# Altium PCB BioZ.PcbDoc (part 2 of 3)
Units mm, origin at the board's own origin, x right, y up, seen from the top; angles counter-clockwise.
Board outline 88 x 75 mm, 4 copper layers (Top Layer, GND1, GND 2, Bottom Layer), stack 1.564 mm thick; 174 components, 106 nets, 519 pads, 307 vias.
Unrouted connection lines stored in the file: 5.
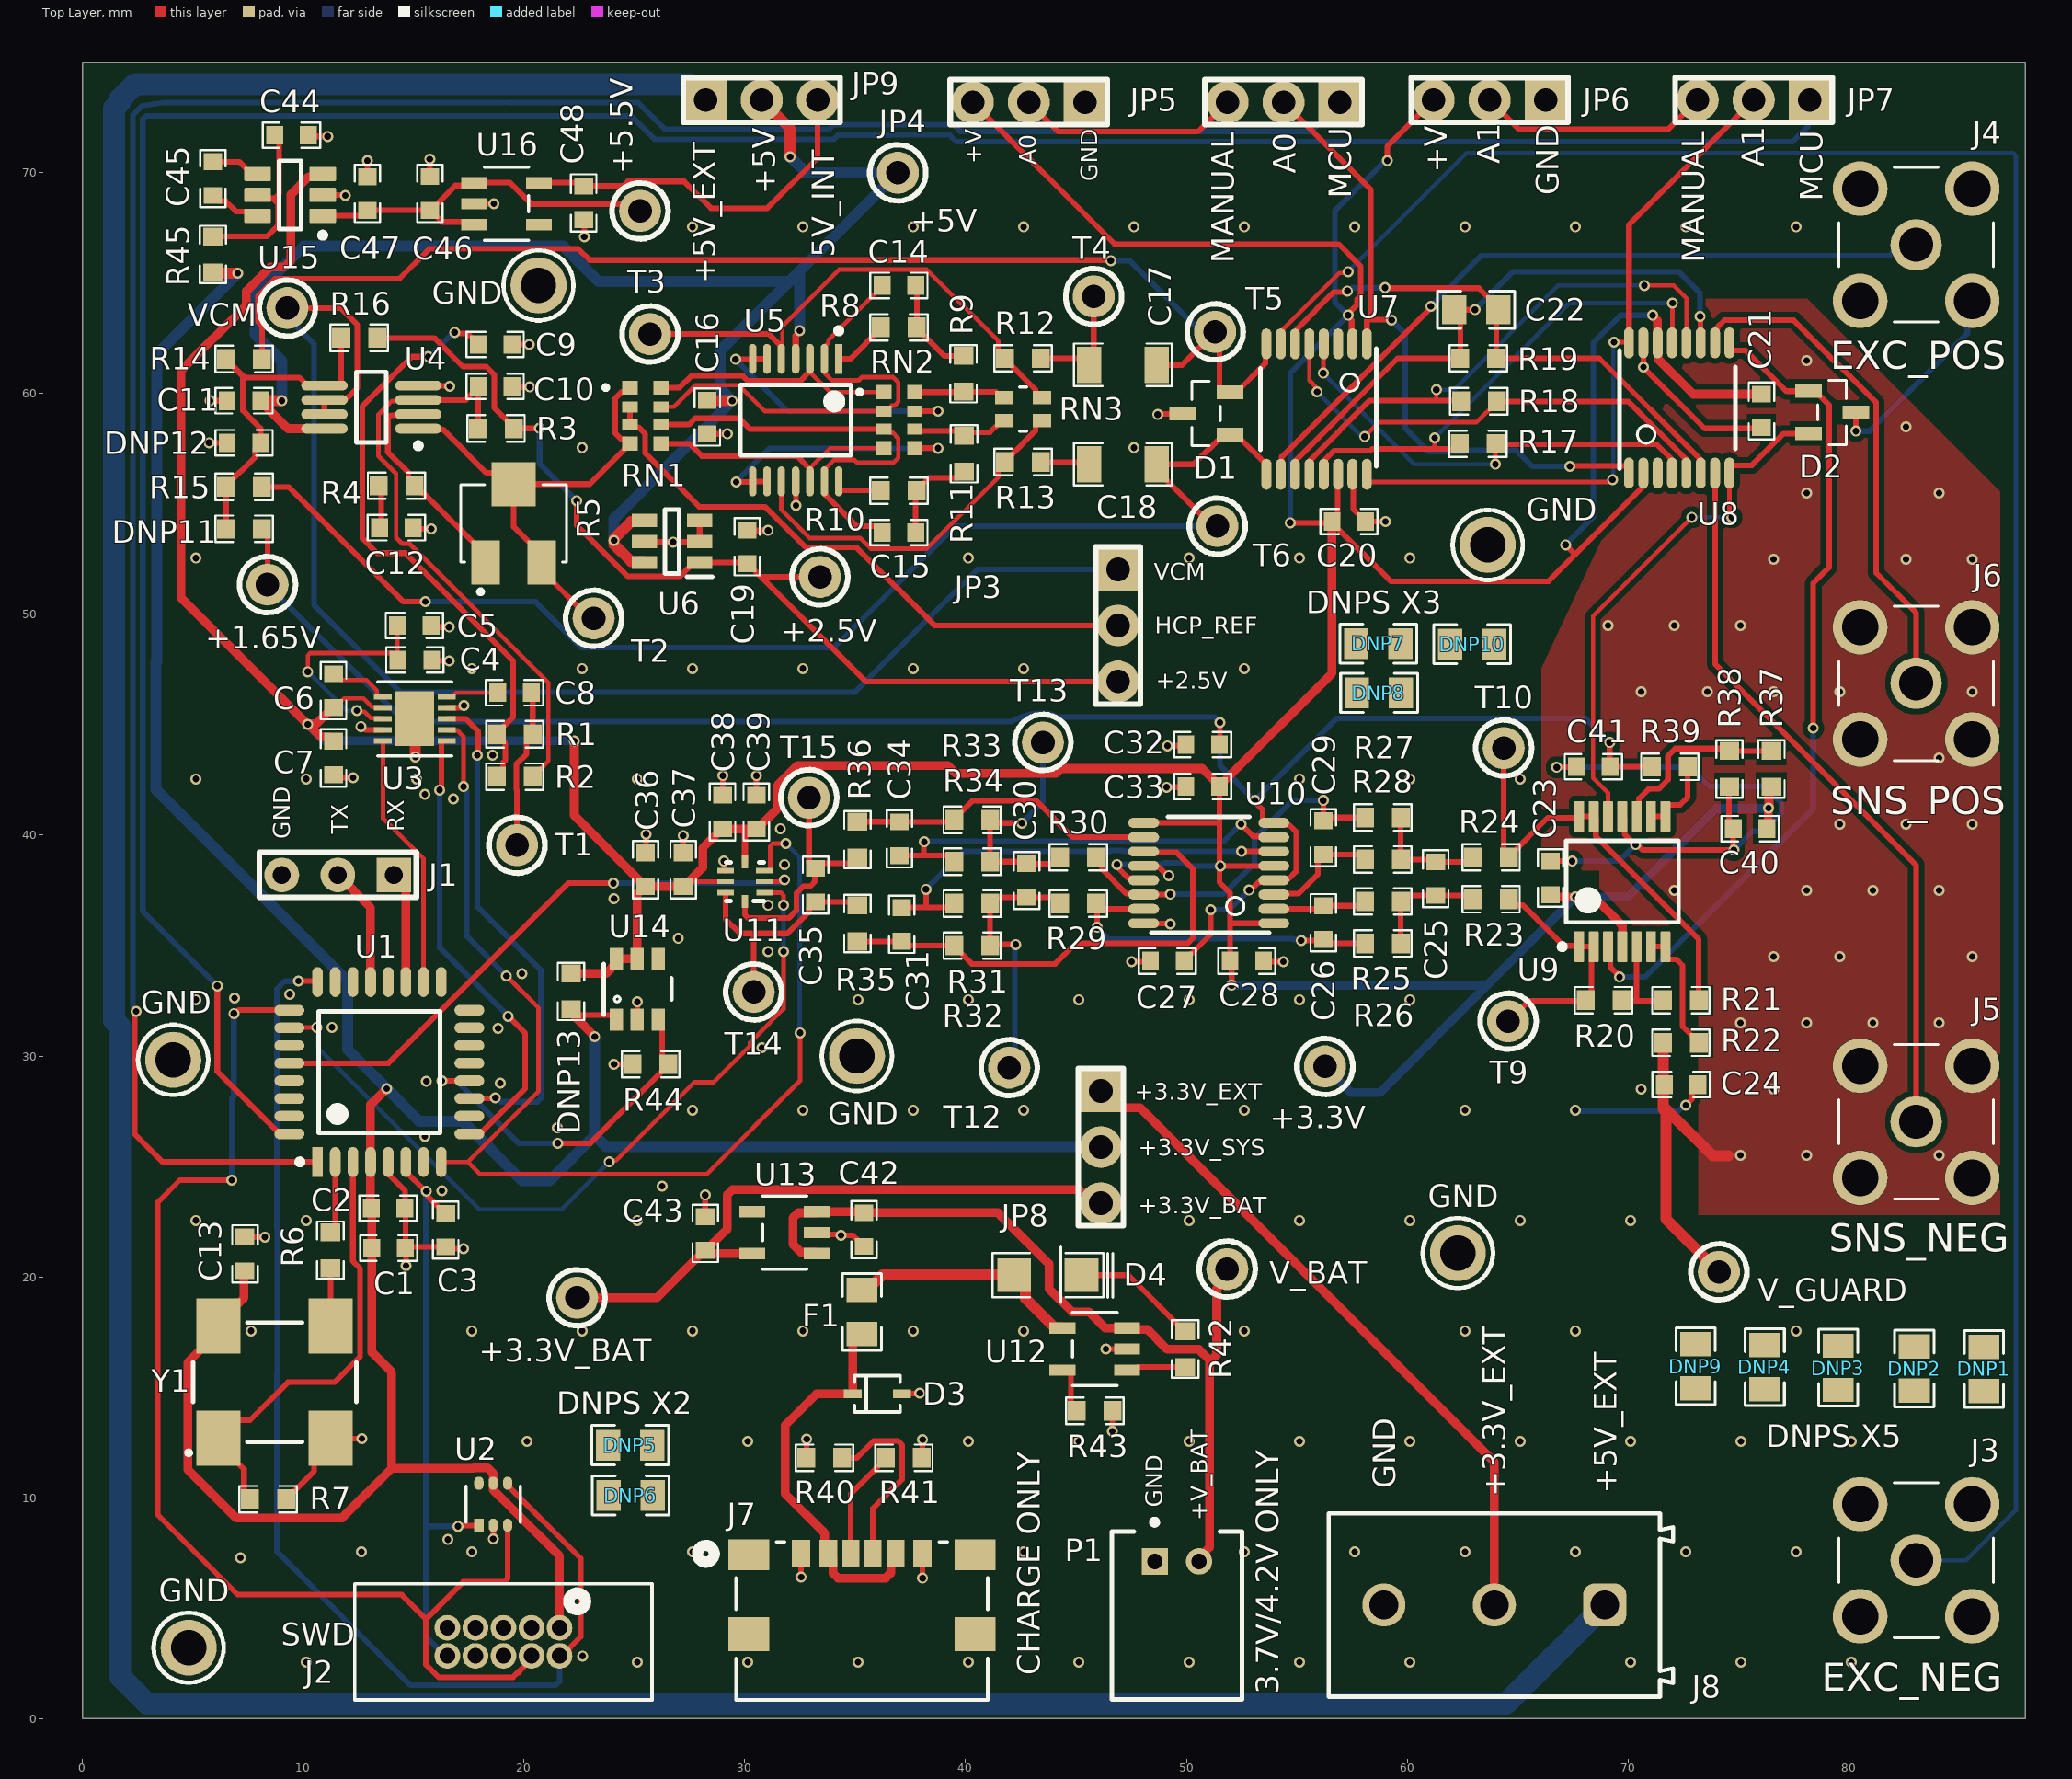
[diagram p0: Top Layer view]

## Via types
v1: diameter 0.5, hole 0.3, Top Layer to Bottom Layer, tented both sides, 307 vias

## Nets (pads, with @x,y where several pads share a name; then routed paths per layer and width w, separated by ;. In a path a pad name is that pad's centre, name@x,y a point inside that pad or via, vN(x,y) a via of type N, cw(c..) or ccw(c..) an arc to the next point about the centre after c; other vN are vias at no path point) (continued)
+3.3V_SYS: (continued)
  Bottom Layer w0.5: v1(7.025,65.45) 3.35,61.775 3.35,47.86 3.318,47.828 3.318,42.075 12,33.394 12,30.3 v1(13.775,28.525) 15.25,27.05 17.213,27.05 19.913,24.35 21.15,24.35 23.2,26.4 ; v1(23.2,30.875) 23.2,26.4 ; JP8.2@46.125,25.875 46.1,25.9 23.7,25.9 23.2,26.4
+5.5V: +5.5V.1 C46.1 C47.1 U15.1 U16.1 U16.3 | length 18.2
  Top Layer w0.254: U15.1@10.875,68.05 12.642,68.05 C47.1@12.892,68.3 ; C47.1@12.9,68.3 15.724,68.3 C46.1@15.725,68.301 C46.1@15.763,68.301 ; U16.1@17.405,69.55 U16.1@17.611,69.55 ; U16.3@17.738,67.65 17.611,67.777 16.287,67.777 C46.1@15.763,68.301 ; +5.5V.1@25.25,68.275 24.941,68.584 20.326,68.584 19.36,69.55 U16.1@17.611,69.55 ; C46.1@15.763,68.301 16.885,69.423 17.405,69.423 17.611,69.423 U16.1@17.738,69.55 U16.1@17.611,69.55
+5V: +5V.1 C11.1 C16.1 JP9.2 U4.8 U5.4 U6.4 U6.6 | length 75
  Top Layer w0.3: U5.4@32.3,61.575 32.3,62.621 32.475,62.796 v1(32.475,62.85)
  Top Layer w0.4: C11.1@8.074,59.675 8.074,59.637 9.298,58.413 U4.8@10.953,58.413
  Top Layer w0.5: C11.1@8.074,59.675 v1(9.025,59.675) ; U6.6@25.45,52.35 25.4,52.4 24.839,52.4 24.075,53.164 v1(24.075,53.35) 24.075,53.436 24.839,54.2 25.4,54.2 U6.4@25.45,54.25 ; C16.1@28.3,59.7 28.325,59.675 v1(29.425,59.675) ; JP9.2@30.76,73.3 32.05,72.01 v1(32.05,70.725)
  Bottom Layer w0.5: v1(9.025,59.675) 9.025,61.473 7.819,62.68 7.819,64.478 10.014,66.674 21.776,66.674 23.375,65.075 32,65.075 ; v1(24.075,53.35) 24.075,54.325 v1(29.425,59.675) 28.875,60.225 28.875,61.95 32,65.075 ; v1(32.05,70.725) 32.775,70 +5V.1@36.925,70 32.475,65.55 ; v1(32.475,62.85) 32.475,65.55 ; 32,65.075 32.475,65.55
+5V_EXT: J8.1 JP9.1 | length 168.4
  Bottom Layer w1: JP9.1@28.22,73.3 27.509,74.011 2.371,74.011 1.7,73.339 1.7,73.213 1.421,72.934 1.421,31.609 1.7,31.33 1.7,1.9 2.929,0.671 64.486,0.671 J8.1@68.95,5.135